# Altium PCB Кросс УБСИ.PcbDoc
Units mil, origin at the board's own origin, x right, y up, seen from the top; angles counter-clockwise.
Board outline 1501.97 x 1974.41 mil, 4 copper layers (Top Layer, Top, Mid-Layer 1, Top1, Mid-Layer 2, Bottom4, Bottom Layer, Bottom); 4 components, 44 nets, 184 pads, 11 vias.
Unrouted connection lines stored in the file: 8.
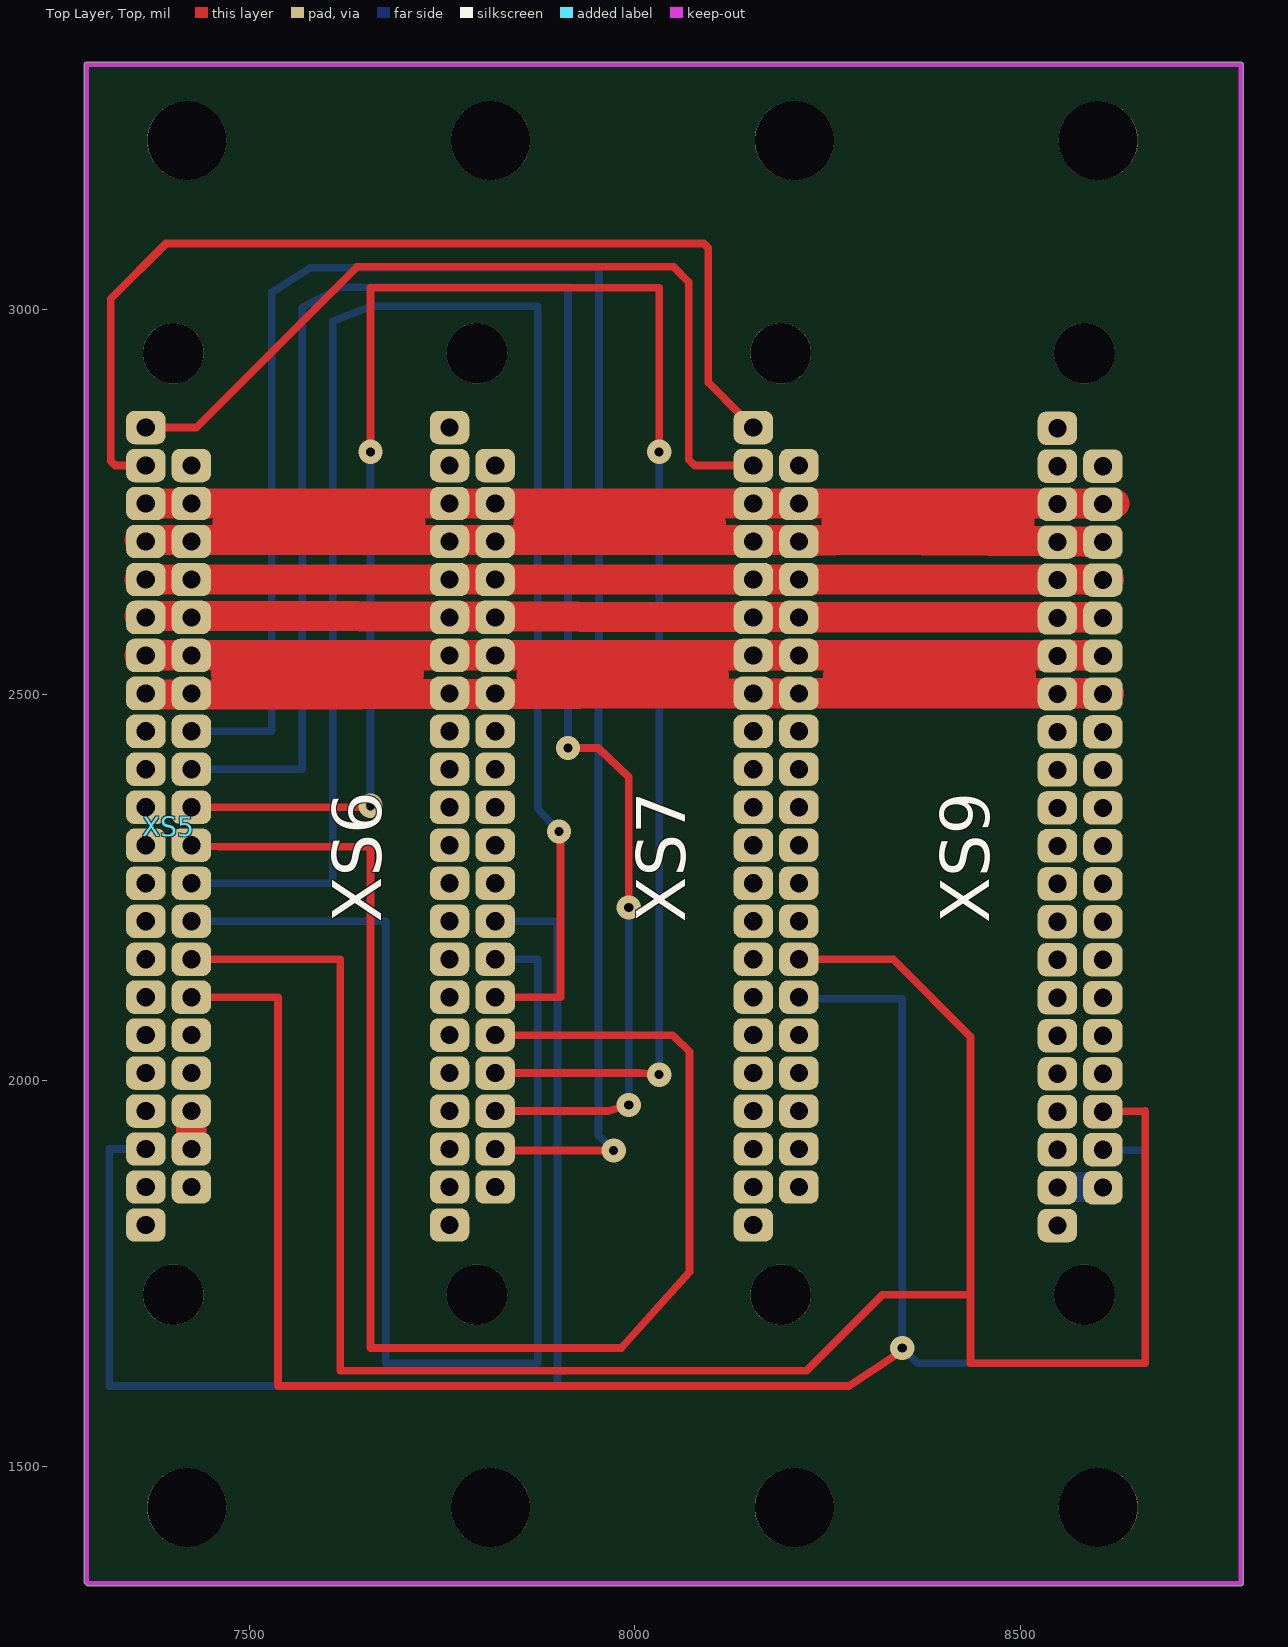
[diagram p0: Top Layer, Top view]
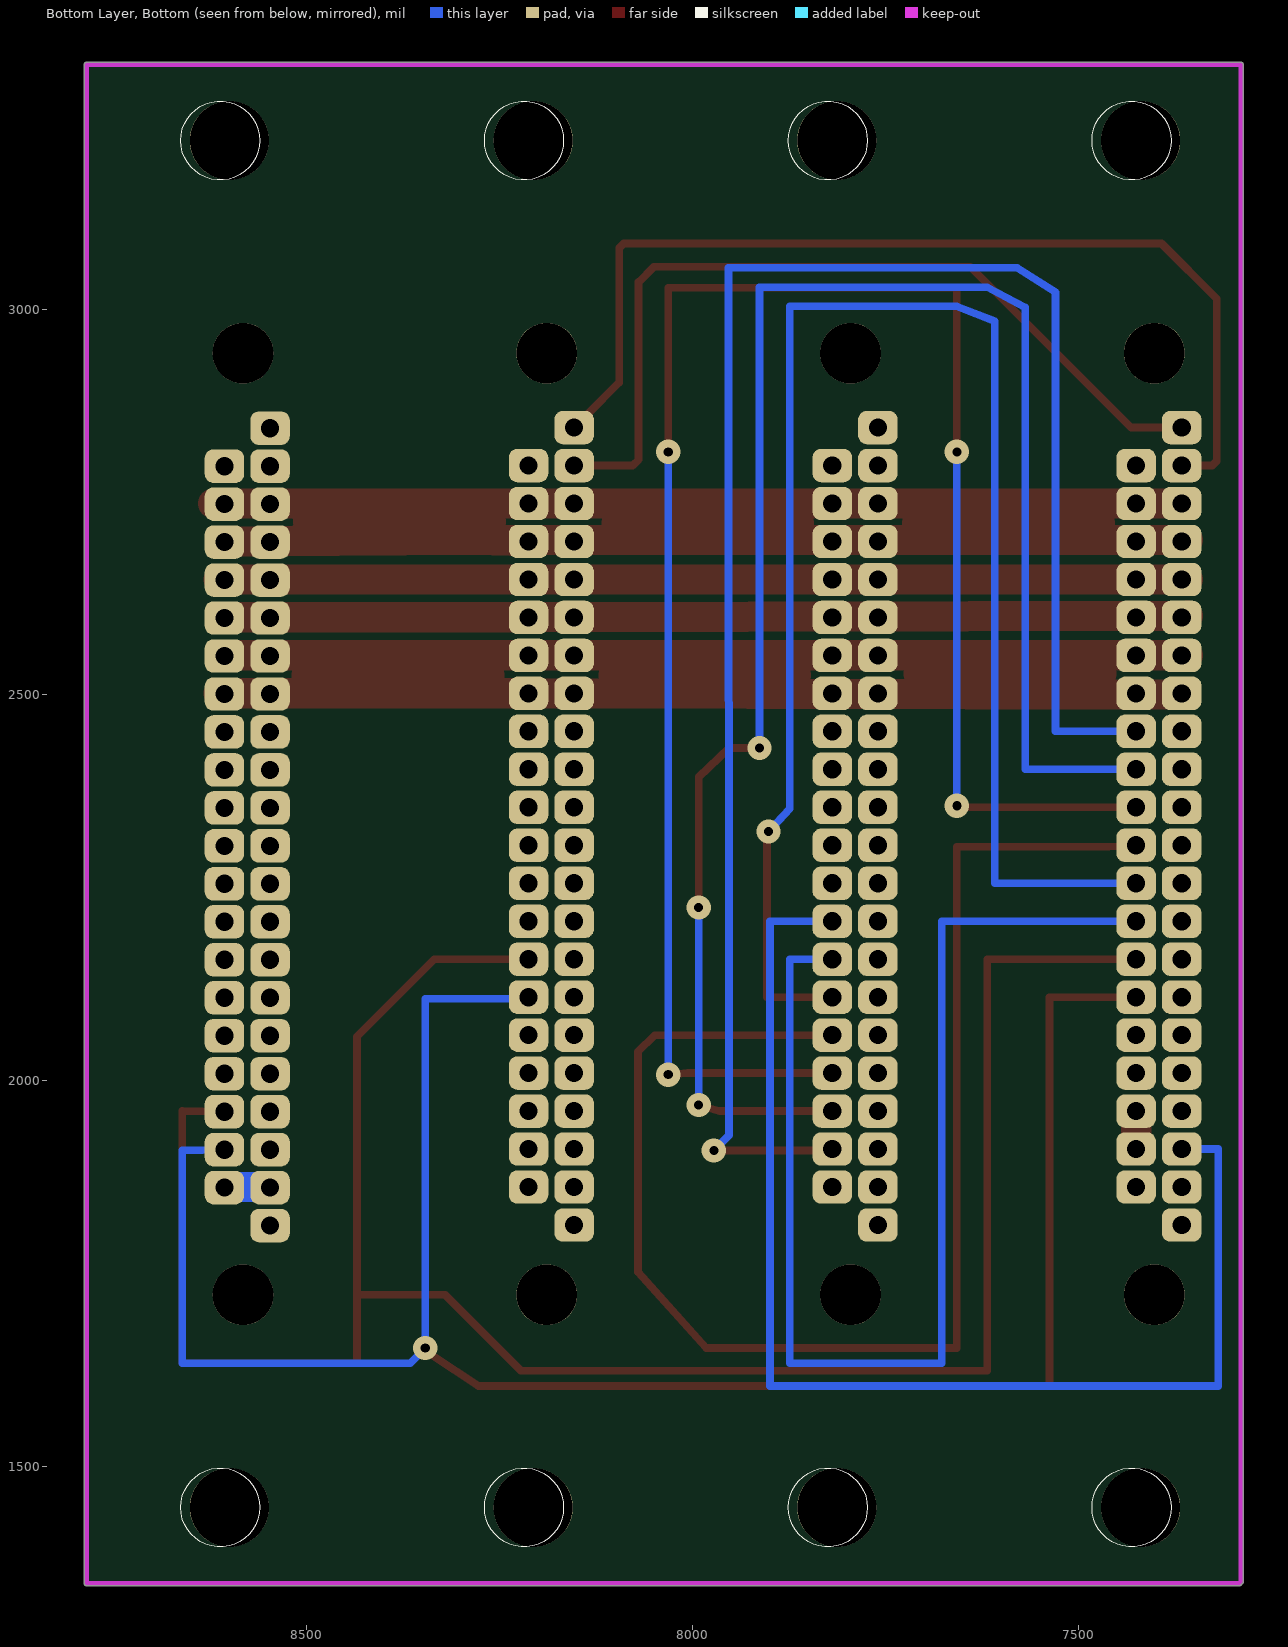
[diagram p1: Bottom Layer, Bottom view, seen from below]
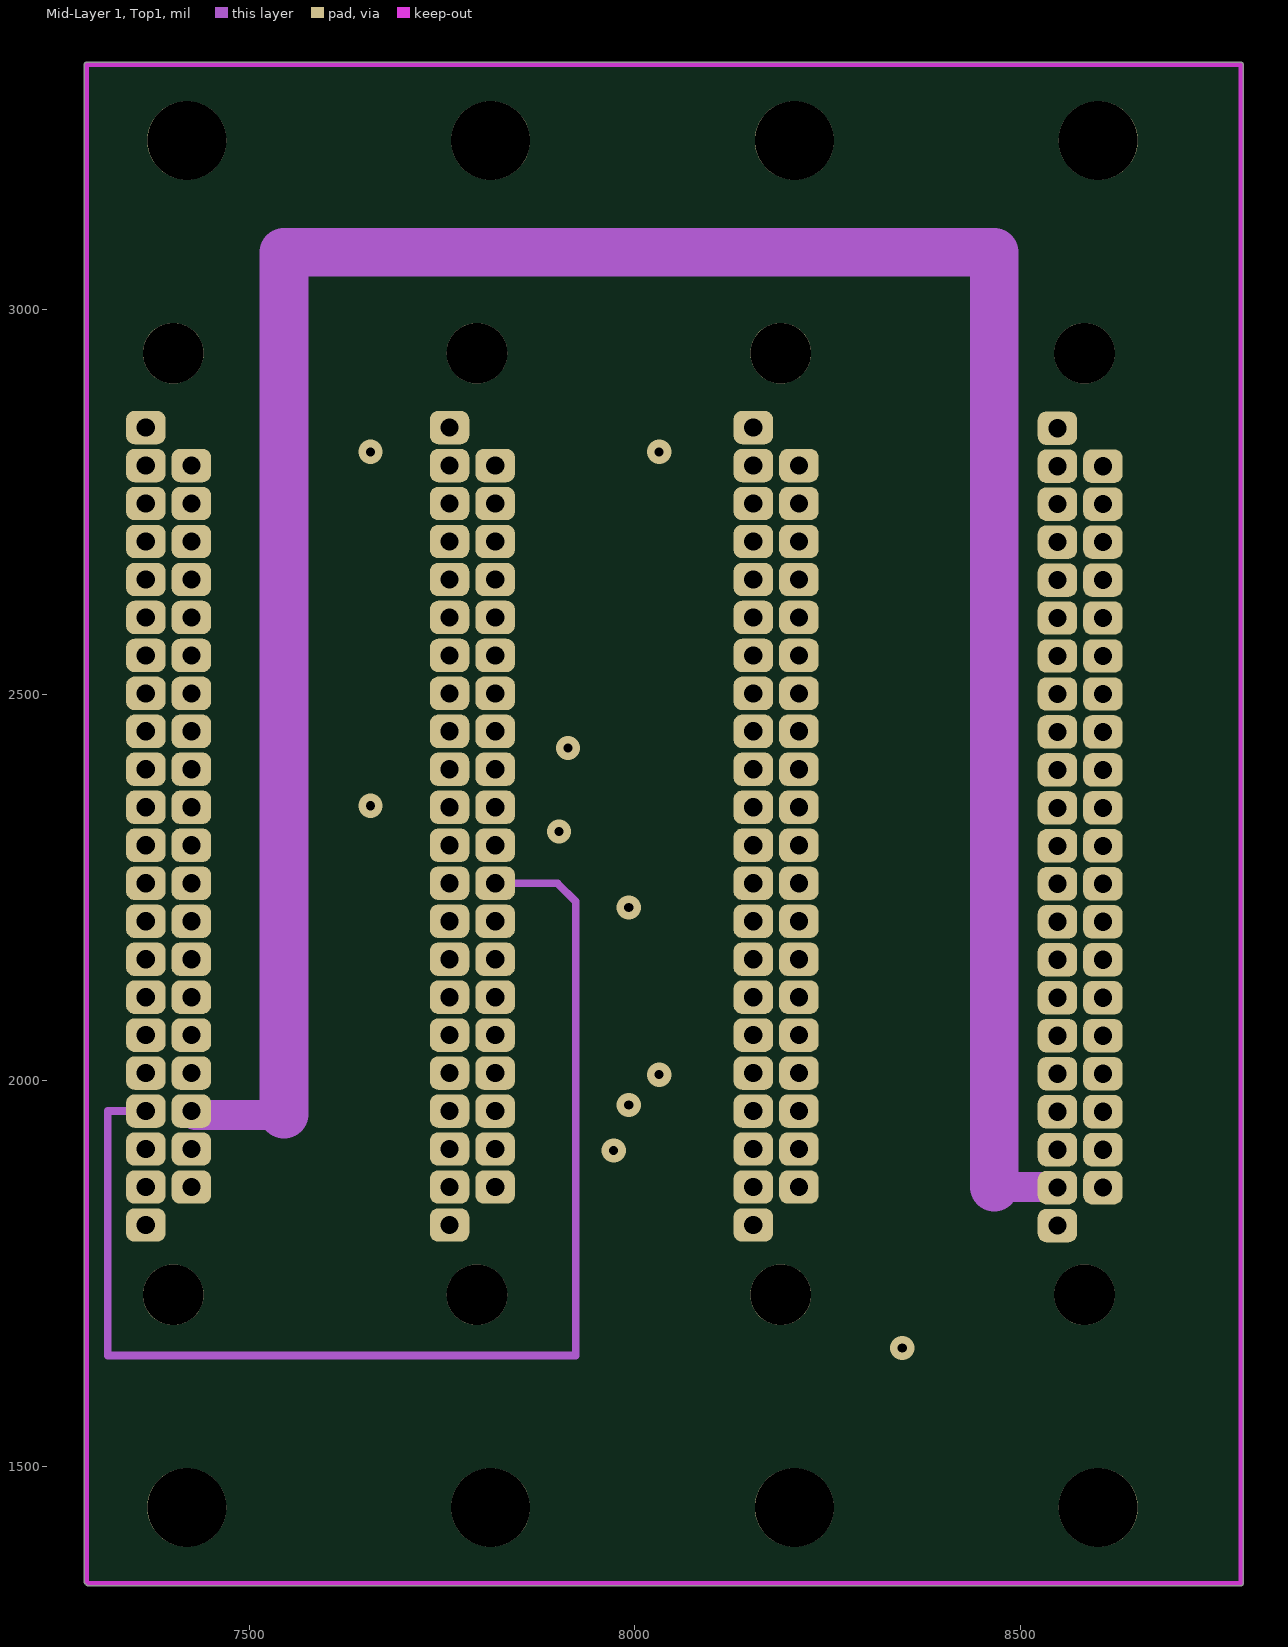
[diagram p2: Mid-Layer 1, Top1]
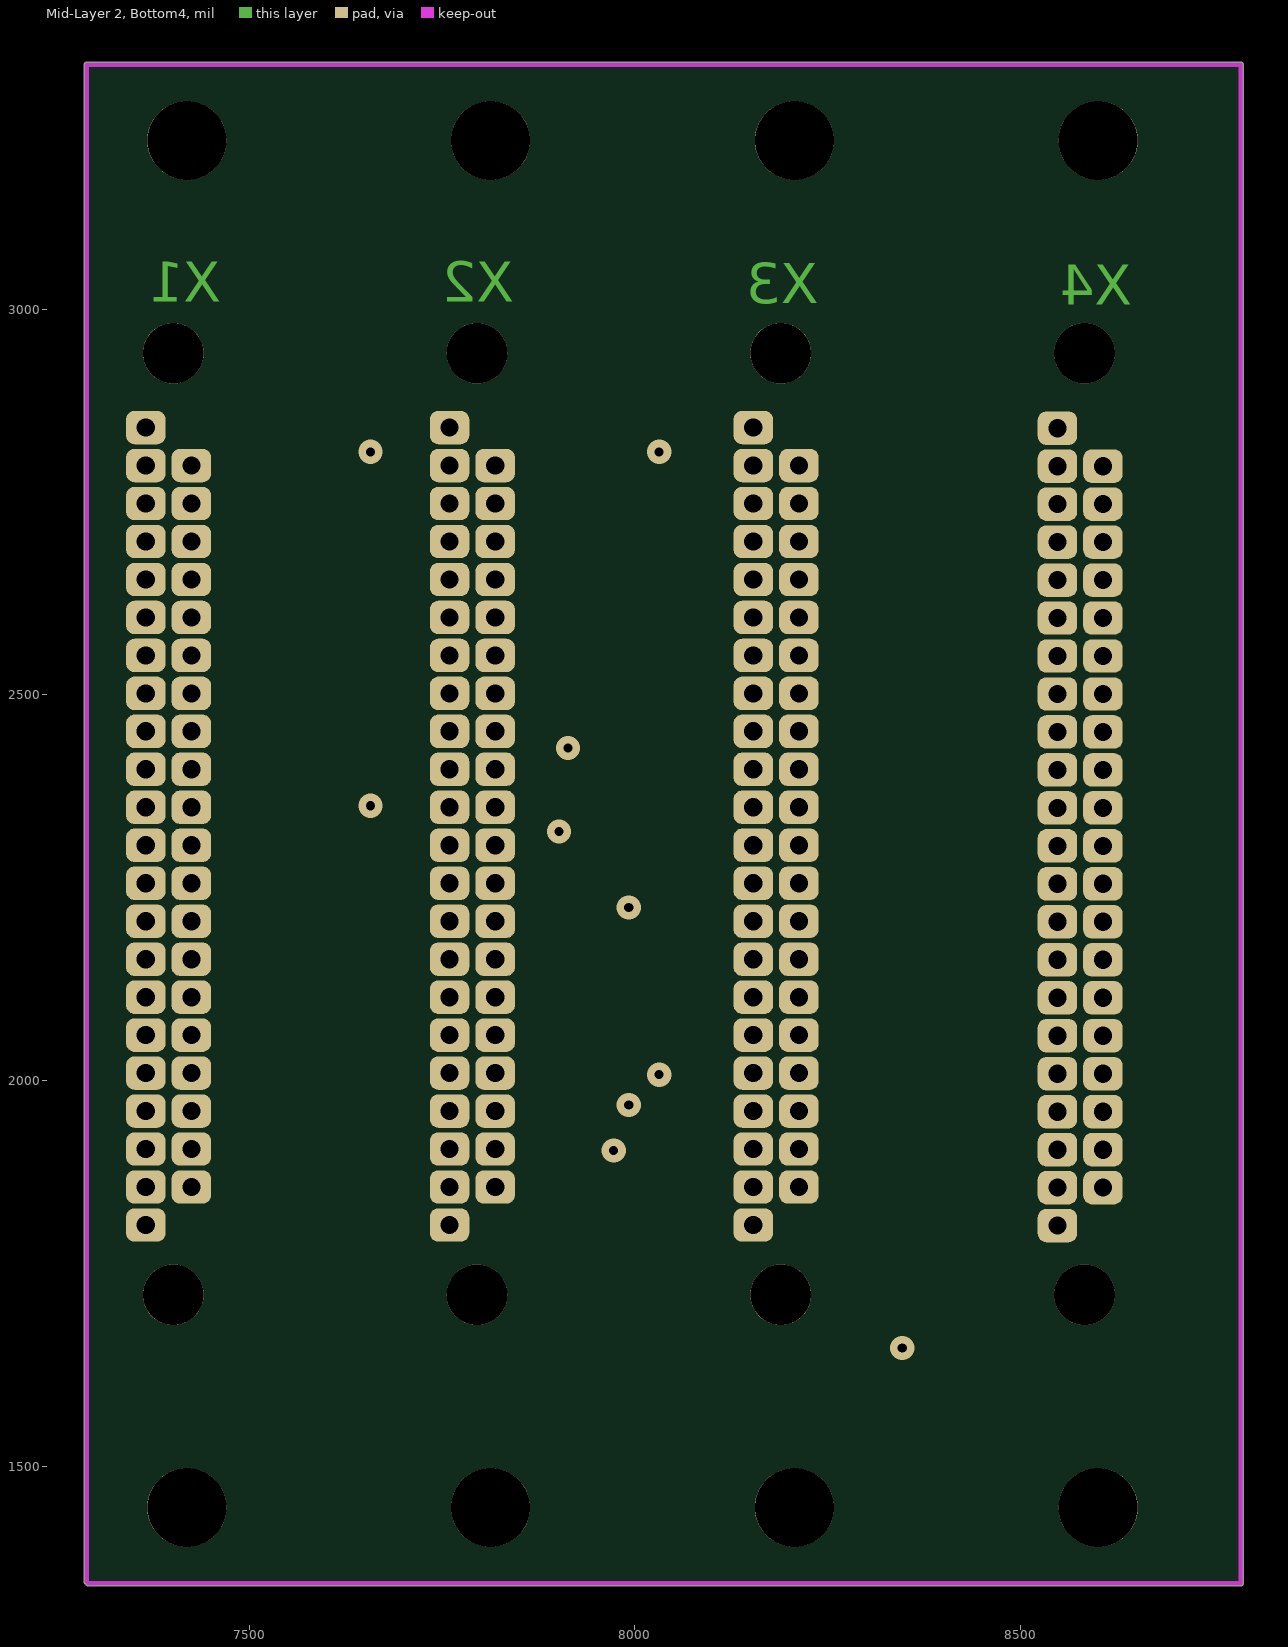
[diagram p3: Mid-Layer 2, Bottom4]

## Layer stack, top to bottom
Top Solder, Top Mask: solder mask 0.4, Solder Resist, Dk 3.5
Top Layer, Top: signal copper 1.4
Dielectric 1: dielectric 12.6, FR-4, Dk 4.8
Mid-Layer 1, Top1: signal copper 1.4
Dielectric2: dielectric 12.6, FR-4, Dk 4.8
Mid-Layer 2, Bottom4: signal copper 1.4
Dielectric3: dielectric 12.6, FR-4, Dk 4.8
Bottom Layer, Bottom: signal copper 1.4
Bottom Solder, Bot Mask: solder mask 0.4, Solder Resist, Dk 3.5

## Board outline
7286.42,1350.39 7286.42,3316.93 cw(c7289.37,3316.93) 7289.37,3319.88 8785.43,3319.88 cw(c8785.43,3316.93) 8788.39,3316.93 8788.39,1348.43 cw(c8785.43,1348.43) 8785.43,1345.47 7291.34,1345.47 cw(c7291.34,1348.43) 7288.51,1347.57 cw(c7289.37,1350.39)

## Design rules (kind name [scope] priority, off if disabled: settings)
Clearance [All] p1: gap=10 ignorepadtopadclearanceinfootprint=FALSE except(7.87: Arc-Arc Arc-Track Arc-THPad Arc-Via Track-Track Track-THPad Track-Via THPad-THPad THPad-Via Via-Via)
PlaneClearance [All] p1: clearance=10
PolygonConnect [All] p1: connectstyle=Relief reliefconductorwidth=10 reliefentries=4 polygonreliefangle="90 Angle" airgapwidth=10
RoutingVias [All] p1: holewidth=28 width=50 viastyle="Through Hole" minholewidth=28 minwidth=50 maxholewidth=28 maxwidth=50
SolderMaskExpansion [All] p1: expansion=4 istentingtop=FALSE
Width [All] p1: maxlimit=10 minlimit=10 preferedwidth=10
29 further rules are at their usual default settings.

## Components (designator, comment, footprint, x,y, rotation, side; value= is the part's Value field where it differs from the comment)
XS5 "" X_ONP-JI-VERT 7425.2,1862.2 r0 top
XS6 "" X_ONP-JI-VERT 7818.9,1862.2 r0 top
XS7 "" X_ONP-JI-VERT 8212.6,1862.2 r0 top
XS9 "" X_ONP-JI-VERT 8606.69,1861.42 r0 top

## Footprints (in the part's own frame and the unit in brackets; to place one, negate y for a bottom-side part, rotate by r counter-clockwise, add the part's x,y. Pads: shape width x height; smd on the part's side, far side on the other; paste and mask are expansions set on the pad)
X_ONP-JI-VERT [mm]
  rrect50% 1.3x1.1 hole 0.6 unplated: 1(0,0) 2(0,1.25) 3(0,2.5) 4(0,3.75) 5(0,5) 6(0,6.25) 7(0,7.5) 8(0,8.75) 9(0,10) 10(0,11.25) 11(0,12.5) 12(0,13.75) 13(0,15) 14(0,16.25) 15(0,17.5) 16(0,18.75) 17(0,20) 18(0,21.25) 19(0,22.5) 20(0,23.75) 21(-1.5,-1.25) 22(-1.5,0) 23(-1.5,1.25) 24(-1.5,2.5) 25(-1.5,3.75) 26(-1.5,5) 27(-1.5,6.25) 28(-1.5,7.5) 29(-1.5,8.75) 30(-1.5,10) 31(-1.5,11.25) 32(-1.5,12.5) 33(-1.5,13.75) 34(-1.5,15) 35(-1.5,16.25) 36(-1.5,17.5) 37(-1.5,18.75) 38(-1.5,20) 39(-1.5,21.25) 40(-1.5,22.5) 41(-1.5,23.75) 42(-1.5,25)

## Free pads (board coordinates)
  round 78.74 hole 78.74 unplated: 0(7401.57,1722.44) 0(7401.57,2942.91) 0(7795.28,1722.44) 0(7795.28,2942.91) 0(8188.98,1722.44) 0(8188.98,2942.91) 0(8582.68,1722.44) 0(8582.68,2942.91)
  round 102.36 hole 102.36 unplated: 0(7419.29,1446.85) 0(7419.29,3218.5) 0(7812.99,1446.85) 0(7812.99,3218.5) 0(8206.69,1446.85) 0(8206.69,3218.5) 0(8600.39,1446.85) 0(8600.39,3218.5)

## Via types
v1: diameter 31.5, hole 11.81, Top Layer, Top to Bottom Layer, Bottom, 11 vias

## Nets (pads, with @x,y where several pads share a name; then routed paths per layer and width w, separated by ;. In a path a pad name is that pad's centre, name@x,y a point inside that pad or via, vN(x,y) a via of type N, cw(c..) or ccw(c..) an arc to the next point about the centre after c; other vN are vias at no path point)
+5V: XS5.14 XS5.15 XS5.35 XS5.36 XS6.14 XS6.15 XS6.35 XS6.36 XS7.14 XS7.15 XS7.35 XS7.36 XS9.14 XS9.15 XS9.35 XS9.36 | length 2965.2
  Top Layer, Top w10: XS7.15 8547.24,2551.18 8547.24,2550.79 XS9.36 8606.3,2551.18 8606.3,2549.21 XS9.15 ; XS9.35 8547.24,2501.97 8606.3,2500 XS9.14@8604.01,2501.97
  Top Layer, Top w39.37: XS5.36@7358.27,2551.18 XS5.36 XS5.15 XS6.36 XS6.15 XS7.36 XS7.15 8216.54,2551.18 8547.24,2551.18 XS9.15@8606.3,2551.18 ; XS5.35 7364.17,2500 7362.2,2500 7364.18,2500 XS7.14 8216.54,2501.97 8547.24,2501.97 8604.01,2501.97 XS9.14@8614.17,2501.97
+6.2V: XS5.2 XS5.3 XS9.1 XS9.22 | length 3562.2
  Top Layer, Top w39.37: XS5.2 XS5.3
  Mid-Layer 1, Top1 w39.37: XS5.3 7430.31,1955.51 7544.09,1955.51 7545.28,1956.69 ; 8465.75,1862.2 v1(8547.24,1862.2)
  Mid-Layer 1, Top1 w62.99: 7545.28,1956.69 7545.28,3073.62 8465.75,3073.62 8465.75,1862.2
  Bottom Layer, Bottom w10: v1(8547.24,1862.2) XS9.22
  Bottom Layer, Bottom w39.37: v1(8547.24,1862.2) XS9.1@8606.3,1862.2
+15V: XS5.16 XS5.37 XS6.16 XS6.37 XS7.16 XS7.37 XS9.16 XS9.37 | length 1377.5
  Top Layer, Top w10: XS9.37 8544.49,2599.61 XS9.37@8571.19,2599.2 ; XS9.16@8606.3,2600.39 XS9.37@8571.19,2599.2 ; XS9.37@8571.19,2599.2 8547.24,2598.43 8543.31,2598.43 XS9.37@8571.19,2599.2
  Top Layer, Top w39.37: XS5.37 7360.24,2600.39 7358.27,2602.36 XS7.16 8216.54,2600.39 XS9.16@8606.3,2600.39
-15V: XS5.17 XS5.38 XS6.17 XS6.38 XS7.17 XS7.38 XS9.17 XS9.38 | length 1427.8
  Top Layer, Top w10: XS9.38@8543.31,2653.15 8546.85,2649.61 XS9.38 8554.4,2649.61 8622.05,2657.48 8543.31,2657.48 XS9.38@8543.31,2653.15
  Top Layer, Top w39.37: XS5.38@7358.27,2649.61 XS5.38 XS5.17 XS6.38 XS6.17 XS7.38 XS7.17 8546.85,2649.61 8554.4,2649.61 8614.17,2649.61 8613.39,2648.82 XS9.17
AIM1: XS9.31
AIM2: XS9.32
CH0-A: XS9.6
CH0-B: XS9.7
CH1-A: XS5.6 XS7.6 XS9.2 | length 2697.2
  Top Layer, Top w10: XS5.6@7440.94,2106.3 XS5.6 7537.4,2108.27 7537.4,1604.33 8277.56,1604.33 8336.61,1643.7 v1(8346.46,1653.54)
  Bottom Layer, Bottom w10: XS7.6 8228.35,2106.3 8346.46,2106.3 v1(8346.46,1653.54) 8366.14,1633.86 8661.42,1633.86 8661.42,1909.45 XS9.2
CH1-B: XS5.7 XS7.7 XS9.3 | length 2879.2
  Top Layer, Top w10: XS5.7 7618.11,2157.48 7618.11,1624.02 8222.44,1624.02 8320.87,1722.44 8435.04,1722.44 ; XS7.7 8334.65,2157.48 8435.04,2057.09 8435.04,1722.44 ; XS9.3 8661.42,1960.63 8661.42,1633.86 8435.04,1633.86 8435.04,1722.44
CH3-A: XS9.8
CH3-B: XS9.9
CH4-A: XS9.24
CH4-B: XS9.25
CH5-A: XS9.28
CH6-A: XS9.4
CH6-B: XS9.5
CH7-A: XS9.26
CH7-B: XS9.27
GND: XS5.18 XS5.19 XS5.39 XS5.40 XS6.18 XS6.19 XS6.39 XS6.40 XS7.18 XS7.19 XS7.39 XS7.40 XS9.18 XS9.19 XS9.39 XS9.40 | length 1672.1
  Top Layer, Top w10: XS9.39 8545.48,2699.23 8500,2724.41 XS9.40
  Top Layer, Top w39.37: XS5.39 7360.24,2698.82 7358.27,2700.79 8283.46,2700.79 ; XS7.18 8283.46,2700.79 ; 8261.81,2724.41 8498.03,2724.41 ; XS9.18 8606.3,2698.43 8606.3,2698.82 8545.48,2699.23 8283.46,2700.79
IN29: XS5.12 XS6.3 | length 2383.7
  Top Layer, Top w10: XS6.3 7964.57,1960.63 v1(7992.13,1968.5) ; v1(7913.39,2431.1) 7952.76,2431.1 7992.13,2393.7 v1(7992.13,2224.41)
  Bottom Layer, Bottom w10: XS5.12 7568.9,2403.54 7568.9,3001.97 7618.11,3028.35 7913.39,3028.35 v1(7913.39,2431.1) ; v1(7992.13,1968.5) v1(7992.13,2224.41)
IN30: XS5.11 XS6.4 | length 2510.1
  Top Layer, Top w10: XS5.11 7645.67,2354.33 v1(7657.48,2356.3) ; v1(7657.48,2814.96) 7657.48,3027.56 8031.5,3027.56 v1(8031.5,2814.96) ; XS6.4 8005.91,2009.84 v1(8031.5,2007.87)
  Bottom Layer, Bottom w10: v1(7657.48,2356.3) v1(7657.48,2814.96) ; v1(8031.5,2007.87) v1(8031.5,2814.96)
IN31: XS5.10 XS6.5 | length 1885.5
  Top Layer, Top w10: XS5.10 7460.63,2303.15 7657.48,2303.15 7657.48,1653.54 7982.28,1653.54 8070.87,1751.97 8070.87,2037.4 8049.21,2059.06 XS6.5
IN44: XS5.13 XS6.2 | length 2412.5
  Top Layer, Top w10: XS6.2 7834.65,1909.45 v1(7972.44,1909.45)
  Bottom Layer, Bottom w10: XS5.13 7529.53,2452.76 7529.53,3021.65 7579.53,3053.54 7953.54,3053.54 7952.76,1929.13 v1(7972.44,1909.45)
IN71: XS5.9 XS6.6 | length 2173.6
  Top Layer, Top w10: XS6.6 7903.54,2108.27 7903.54,2322.83 v1(7901.57,2322.83)
  Bottom Layer, Bottom w10: XS5.9 7608.27,2255.91 7608.27,2984.25 7657.48,3003.54 7874.02,3003.54 7874.02,2352.36 v1(7901.57,2322.83)
IN72: XS5.8 XS6.7 | length 1600.4
  Bottom Layer, Bottom w10: XS5.8 7677.17,2206.69 7677.17,1633.86 7874.02,1633.86 7874.02,2157.48 XS6.7
IN73: XS5.24 XS6.9 | length 1675.1
  Mid-Layer 1, Top1 w10: XS5.24 7316.93,1960.63 7316.93,1643.7 7923.23,1643.7 7923.23,2232.28 7899.61,2255.91 XS6.9
IN88: XS5.23 XS6.8 | length 1618.1
  Bottom Layer, Bottom w10: XS5.23 7318.9,1911.42 7318.9,1604.33 7899.61,1604.33 7899.61,2206.69 XS6.8
IN89: XS5.25
IN90: XS5.26
IN91: XS5.27
IN92: XS5.28
IN93: XS5.29
IN94: XS5.30
IN95: XS5.31
IN96: XS5.32
MBR: XS9.34
OUT1-A: XS9.10
OUT1-B: XS9.11
OUT2-A: XS9.12
OUT2-B: XS9.13
RXD0: XS5.41 XS7.42 | length 1321.8
  Top Layer, Top w10: XS5.41 7326.66,2797.24 7320.8,2803.1 7320.8,3013.55 7392.26,3085 8089.14,3085 8095,3079.14 8095,2905 8136.55,2863.45 8136.55,2862.67 8152.76,2846.46 XS7.42
TXD0: XS5.42 XS7.41 | length 1115.3
  Top Layer, Top w10: XS5.42 7431.46,2846.46 7640,3055 8050,3055 8070,3035 8070,2805 8077.76,2797.24 XS7.41
VI: XS9.33
pads on no net: XS5.1 XS5.4 XS5.5 XS5.20 XS5.21 XS5.22 XS5.33 XS5.34 XS6.1 XS6.10 XS6.11 XS6.12 XS6.13 XS6.20 XS6.21 XS6.22 XS6.23 XS6.24 XS6.25 XS6.26 XS6.27 XS6.28 XS6.29 XS6.30 XS6.31 XS6.32 XS6.33 XS6.34 XS6.41 XS6.42 XS7.1 XS7.2 XS7.3 XS7.4 XS7.5 XS7.8 XS7.9 XS7.10 XS7.11 XS7.12 XS7.13 XS7.20 XS7.21 XS7.22 XS7.23 XS7.24 XS7.25 XS7.26 XS7.27 XS7.28 XS7.29 XS7.30 XS7.31 XS7.32 XS7.33 XS7.34 XS9.20 XS9.21 XS9.23 XS9.29 XS9.30 XS9.41 XS9.42
copper on no net: | length 3296.9
  Top Layer, Top w10: 7366.14,1811.02 7366.14,1812.99 7366.14,1811.02
  Top Layer, Top w39.37: 7365.39,2748.03 8621.3,2748.03 ; 7366.14,2748.03 8212.6,2748.03 ; 7470.47,2527.56 7706.69,2527.56 ; 7472.44,2722.44 7708.66,2722.44 ; 7862.2,2722.44 8098.43,2722.44 ; 7866.14,2525.59 8102.36,2525.59 ; 8263.78,2525.59 8500,2525.59
  Bottom Layer, Bottom w10: 8149.61,1858.27 8153.54,1862.2 ; 8153.54,1811.02 8153.54,1812.99 8153.54,1811.02

## Keep-outs
Keep-Out Layer, Board:
  lines w5.91: 7289.37,1350.39 7289.37,3316.93 8785.43,3316.93 8785.43,1348.43 7291.34,1348.43

## Other copper
Mid-Layer 2, Bottom4:
  text "X1" at 7464.17,3009.45 h52.08
  text "X2" at 7843.7,3009.45 h52.08
  text "X3" at 8238.19,3007.87 h52.08
  text "X4" at 8644.49,3005.91 h52.08

## Silkscreen, mask and mechanical layers (free items; w line width, h text height)
Bottom Overlay, Bot Silk:
  circle w0.04: c7824.8,3218.5 r51.18
  circle w0.04: c7824.8,1446.85 r51.18
  circle w0.04: c8612.2,3218.5 r51.18
  circle w0.04: c8612.2,1446.85 r51.18
  circle w0.04: c8218.5,3218.5 r51.18
  circle w0.04: c8218.5,1446.85 r51.18
  circle w0.04: c7431.1,3218.5 r51.18
  circle w0.04: c7431.1,1446.85 r51.18
Mechanical 3, MissingLayer12:
  text "42" at 7372.44,2867.32 h49.21
  text "42" at 7724.8,2832.68 h49.21
  text "42" at 8120.47,2828.74 h49.21
  text "42" at 8511.02,2818.9 h49.21
  text "1" at 7902.36,1823.62 h49.21
  text "1" at 7529.53,1820.87 h49.21
  text "1" at 8336.61,1820.87 h49.21
  text "1" at 8730.32,1820.87 h49.21